# EAGLE board RGBMatrixHat (EAGLE 7.6.0)
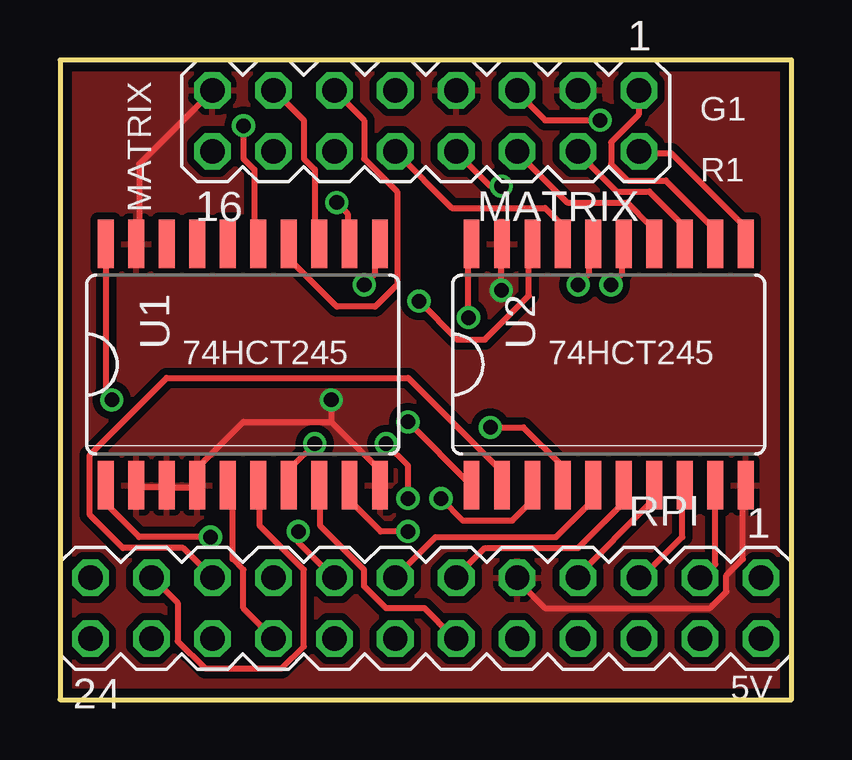
[diagram p0: board, top side]
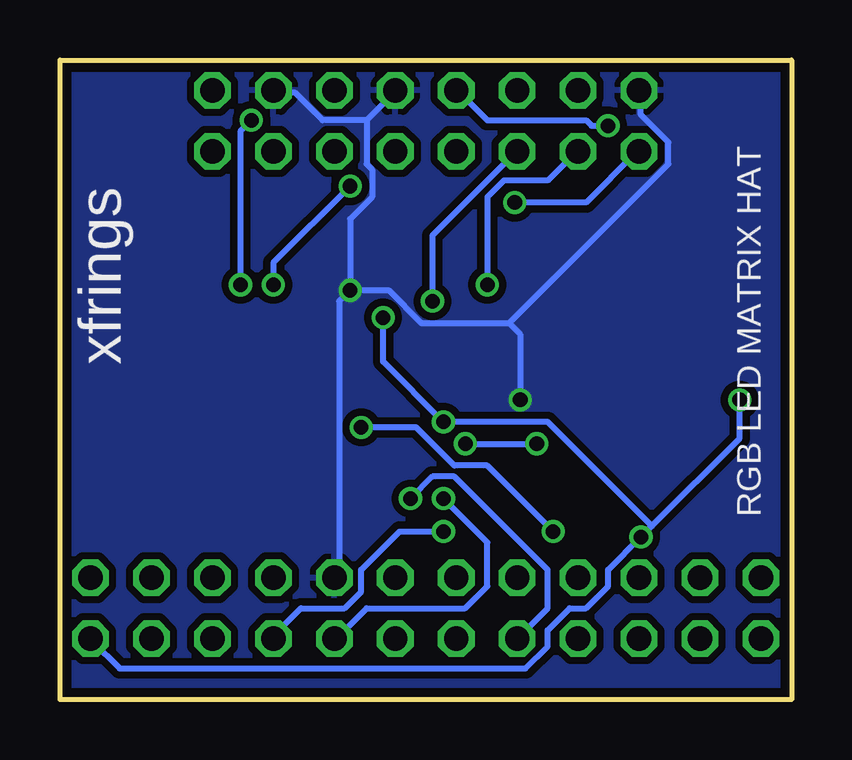
[diagram p1: board, bottom side, seen from below]

Size 30.48 x 26.67 mm. Coordinates in mm from the lower left corner, seen from the top.
Outline: 30.48,0 30.48,26.67 0,26.67 0,0 30.48,0
Copper layers (1*16): Top 0.0356mm / dielectric 1.5011mm / Bottom 0.0356mm
Design rules "oshpark-2layer": minimum track width 6mil, minimum drill 13mil, track to track 6mil, track to pad 6mil, pad to pad 6mil, via to via 6mil, smd to smd 6mil, copper to edge 15mil, drill to drill 6mil, minimum pad ring 7mil, minimum via ring 7mil, stop-mask expansion 2.5mil, vias tented up to drill 0mil, thermal gap 10mil

## Footprints (pad centres in the part's own frame; a part is rotated, then mirrored left to right if it is on the bottom)
MA08-2 = drill 1.016 octagon: 1 -8.89,-1.27; 2 -8.89,1.27; 3 -6.35,-1.27; 4 -6.35,1.27; 5 -3.81,-1.27; 6 -3.81,1.27; 7 -1.27,-1.27; 8 -1.27,1.27; 9 1.27,-1.27; 10 1.27,1.27; 11 3.81,-1.27; 12 3.81,1.27; 13 6.35,-1.27; 14 6.35,1.27; 15 8.89,-1.27; 16 8.89,1.27
MA12-2 = drill 1.016 octagon: 1 -13.97,-1.27; 2 -13.97,1.27; 3 -11.43,-1.27; 4 -11.43,1.27; 5 -8.89,-1.27; 6 -8.89,1.27; 7 -6.35,-1.27; 8 -6.35,1.27; 9 -3.81,-1.27; 10 -3.81,1.27; 11 -1.27,-1.27; 12 -1.27,1.27; 13 1.27,-1.27; 14 1.27,1.27; 15 3.81,-1.27; 16 3.81,1.27; 17 6.35,-1.27; 18 6.35,1.27; 19 8.89,-1.27; 20 8.89,1.27; 21 11.43,-1.27; 22 11.43,1.27; 23 13.97,-1.27; 24 13.97,1.27
SO20W = smd 0.66 x 2.032: 1 -5.715,-5.029; 2 -4.445,-5.029; 3 -3.175,-5.029; 4 -1.905,-5.029; 5 -0.635,-5.029; 6 0.635,-5.029; 7 1.905,-5.029; 8 3.175,-5.029; 9 4.445,-5.029; 10 5.715,-5.029; 11 5.715,5.029; 12 4.445,5.029; 13 3.175,5.029; 14 1.905,5.029; 15 0.635,5.029; 16 -0.635,5.029; 17 -1.905,5.029; 18 -3.175,5.029; 19 -4.445,5.029; 20 -5.715,5.029

## Placement (x,y rotation side)
MATRIX  J2  [MA08-2]  15.24,24.13 180 top
RPI  J1  [MA12-2]  15.24,3.81 180 top
U1  74LS245DW  [SO20W]  7.62,13.97 0 top
U2  74LS245DW  [SO20W]  22.86,13.97 0 top

## Library data of the parts
MATRIX RPI = con-lstb; OC_FARNELL: unknown; OC_NEWARK: unknown
U1 U2 = 74xx-us

## Nets
GND: MATRIX.3 MATRIX.7 MATRIX.15 RPI.9 U1.2 U1.3 U1.4 U1.10 U1.19 U2.10 U2.19
N$1: RPI.3 U2.9
N$2: RPI.5 U2.8
N$3: RPI.7 U2.7
N$4: MATRIX.2 U2.11
N$5: MATRIX.4 U2.13
N$6: MATRIX.5 U2.15
N$7: MATRIX.1 U2.12
N$8: RPI.11 U2.6
N$9: RPI.13 U2.5
N$10: RPI.15 U2.4
N$11: MATRIX.6 U2.14
N$12: MATRIX.8 U2.16
N$13: MATRIX.14 U1.11
N$15: RPI.8 U1.9
N$16: MATRIX.10 U2.17
N$17: MATRIX.12 U2.18
N$18: MATRIX.16 U1.12
N$19: RPI.19 U2.2
N$20: RPI.16 U2.3
N$21: MATRIX.9 U1.15
N$22: MATRIX.11 U1.14
N$23: RPI.12 U1.8
N$24: MATRIX.13 U1.13
N$27: RPI.10 U1.7
N$28: RPI.2 U1.1 U1.20 U2.1 U2.20
N$30: RPI.21 U1.6
N$31: RPI.18 U1.5

## Tracks (layer width: path | path; a pad name or v marks a point on that pad's centre or on a via)
GND  (via drill 0.61)
  Top 0.254: U2.10 28.45,8.84 28.45,5.87 27.76,5.18 27.76,4.5 27.08,3.81 20.22,3.81 19.07,4.95 RPI.9 | 4.45,8.84 3.3,8.84 U1.2 | 4.45,8.84 5.59,8.84 U1.4 5.82,9.07 5.82,9.75 7.64,11.58 11.3,11.58 | 4.45,8.84 U1.3 | 11.3,11.58 13.13,9.75 13.13,9.07 U1.10 | U1.19 3.3,19.13 3.3,22.33 6.27,25.3 MATRIX.15 | v18.39,17.07 18.39,18.9 U2.19 | v11.3,12.5 11.3,11.58
  Bottom 0.254: v18.39,17.07 18.39,20.04 17.47,20.96 17.47,22.1 17.7,22.33 17.7,24.15 | 17.7,24.15 16.56,25.3 MATRIX.7 | 17.7,24.15 19.53,24.15 20.68,25.3 21.59,25.3 MATRIX.3 | 11.76,15.7 5.13,22.33 5.13,23.24 6.27,24.38 6.27,25.3 MATRIX.15 | 11.76,15.7 15.42,15.7 16.79,17.07 v18.39,17.07 | v11.3,12.5 11.3,15.24 11.76,15.7 | v18.39,17.07 18.85,16.61 18.85,5.18 RPI.9
  pour Top (isolate 0.305): 0,26.67 0,0 30.48,0 30.48,26.67
  pour Bottom (isolate 0.305): 0,26.67 30.48,26.67 30.48,0 0,0
N$1
  Top 0.254: U2.9 27.3,5.64 26.85,5.18 RPI.3
N$2
  Top 0.254: U2.8 25.93,8.84 25.93,6.78 24.33,5.18 RPI.5
N$3
  Top 0.254: U2.7 24.56,8.84 24.56,8.15 21.59,5.18 RPI.7
N$4
  Top 0.254: U2.11 28.45,19.13 28.45,19.81 25.48,22.78 24.33,22.78 MATRIX.2
N$5
  Top 0.254: U2.13 25.93,19.13 25.93,19.81 24.56,21.18 23.19,21.18 21.59,22.78 MATRIX.4
N$6  (via drill 0.61)
  Top 0.254: v22.96,17.3 23.42,17.75 23.42,18.9 U2.15 | v22.5,24.15 20.22,24.15 19.07,25.3 MATRIX.5
  Bottom 0.254: v22.96,17.3 22.96,23.7 v22.5,24.15
N$7
  Top 0.254: U2.12 27.3,19.58 25.25,21.64 23.65,21.64 22.96,22.33 22.96,23.24 24.1,24.38 24.1,25.3 MATRIX.1
N$8
  Top 0.254: U2.6 23.42,8.84 23.42,8.15 21.59,6.32 17.7,6.32 16.56,5.18 RPI.11
N$9
  Top 0.254: U2.5 22.05,8.84 22.05,8.15 20.68,6.78 15.65,6.78 14.05,5.18 RPI.13
N$10  (via drill 0.61)
  Top 0.254: v17.93,11.35 19.3,11.35 20.9,9.75 20.9,9.07 U2.4 | v9.93,7.01 9.93,6.55 11.3,5.18 RPI.15
  Bottom 0.254: v17.93,11.35 15.65,11.35 14.05,9.75 12.67,9.75 v9.93,7.01
N$11
  Top 0.254: U2.14 24.56,19.13 24.56,19.81 23.65,20.73 21.13,20.73 19.07,22.78 MATRIX.6
N$12  (via drill 0.61)
  Top 0.254: v21.59,17.3 22.05,17.75 22.05,18.9 U2.16 | v18.39,21.41 17.93,21.41 16.56,22.78 MATRIX.8
  Bottom 0.254: v21.59,17.3 21.59,18.21 v18.39,21.41
N$13  (via drill 0.61)
  Top 0.254: v12.67,17.3 13.13,17.75 13.13,18.9 U1.11
  Bottom 0.254: v12.67,17.3 12.67,20.96 11.99,21.64 10.16,21.64 9.02,22.78 MATRIX.14
N$15  (via drill 0.61)
  Top 0.254: v14.5,7.01 13.36,7.01 12.22,8.15 12.22,8.84 U1.9
  Bottom 0.254: v14.5,7.01 16.33,7.01 17.93,5.41 17.93,4.5 18.62,3.81 20.45,3.81 21.59,2.67 RPI.8
N$16
  Top 0.254: MATRIX.10 16.33,20.5 20.22,20.5 20.9,19.81 20.9,19.13 U2.17
N$17  (via drill 0.61)
  Top 0.254: v14.96,16.61 16.56,15.01 17.7,15.01 19.53,16.84 19.53,18.9 U2.18
  Bottom 0.254: v14.96,16.61 14.96,19.36 11.53,22.78 MATRIX.12
N$18  (via drill 0.61)
  Top 0.254: v11.53,20.73 11.99,20.27 11.99,19.13 U1.12
  Bottom 0.254: v11.53,20.73 8.56,20.73 6.5,22.78 MATRIX.16
N$19
  Top 0.254: U2.2 18.39,9.07 18.39,9.52 14.5,13.41 4.45,13.41 1.24,10.21 1.24,7.7 2.62,6.32 5.13,6.32 6.27,5.18 RPI.19
N$20  (via drill 0.61)
  Top 0.254: v15.88,8.38 16.79,7.47 18.85,7.47 19.53,8.15 19.53,8.84 U2.3
  Bottom 0.254: v15.88,8.38 14.96,9.3 14.05,9.3 10.16,5.41 10.16,3.81 RPI.16
N$21  (via drill 0.61)
  Top 0.254: v7.64,23.93 7.64,22.55 8.1,22.1 8.1,19.13 U1.15
  Bottom 0.254: v7.64,23.93 8.33,23.93 8.56,24.15 12.67,24.15 13.82,25.3 MATRIX.9
N$22
  Top 0.254: MATRIX.11 12.67,24.15 12.67,22.55 14.05,21.18 14.05,17.3 13.13,16.38 11.53,16.38 9.7,18.21 9.7,18.9 U1.14
N$23
  Top 0.254: U1.8 10.85,8.84 10.85,7.24 12.67,5.41 12.67,4.72 13.59,3.81 15.19,3.81 16.33,2.67 RPI.12
N$24
  Top 0.254: U1.13 10.62,19.13 10.62,22.1 10.16,22.55 10.16,24.15 9.02,25.3 MATRIX.13
N$27  (via drill 0.61)
  Top 0.254: v10.62,10.67 9.7,9.75 9.7,9.07 U1.7 | v13.59,10.67 14.5,9.75 v14.5,8.38
  Bottom 0.254: v13.59,10.67 v10.62,10.67 | v14.5,8.38 12.67,6.55 12.67,4.72 13.59,3.81 17.7,3.81 18.85,2.67 RPI.10
N$28  (via drill 0.61)
  Top 0.254: v6.27,6.78 3.3,6.78 1.93,8.15 1.93,8.84 U1.1 | v2.16,12.5 1.93,12.72 1.93,18.9 U1.20 | v14.5,11.58 U2.1 | v17.02,15.93 17.02,18.9 U2.20
  Bottom 0.254: RPI.2 29.13,2.44 27.99,1.29 11.07,1.29 10.16,2.21 10.16,2.9 9.25,3.81 8.56,3.81 7.64,4.72 7.64,5.41 v6.27,6.78 5.82,7.24 | v2.16,12.5 2.16,10.9 5.82,7.24 | 5.82,7.24 10.16,11.58 v14.5,11.58 17.02,14.1 v17.02,15.93
N$30
  Top 0.254: U1.6 8.33,8.84 8.33,7.24 10.16,5.41 10.16,2.21 9.25,1.29 6.04,1.29 4.9,2.44 4.9,4.04 3.99,4.95 RPI.21
N$31
  Top 0.254: U1.5 7.19,8.84 7.19,5.87 7.64,5.41 7.64,3.81 8.79,2.67 RPI.18

## Text on the board
tPlace: G1 | R1 | MATRIX | 74HCT245 | 74HCT245 | 5V
bPlace: xfrings | RGB LED MATRIX HAT